# Altium PCB UC-526.PcbDoc (part 3 of 3)
Units mil, origin at the board's own origin, x right, y up, seen from the top; angles counter-clockwise.
Board outline 3149.61 x 3149.61 mil, 2 copper layers (Top Layer, Bottom Layer); 464 components, 208 nets, 2160 pads, 392 vias.
Unrouted connection lines stored in the file: 5.
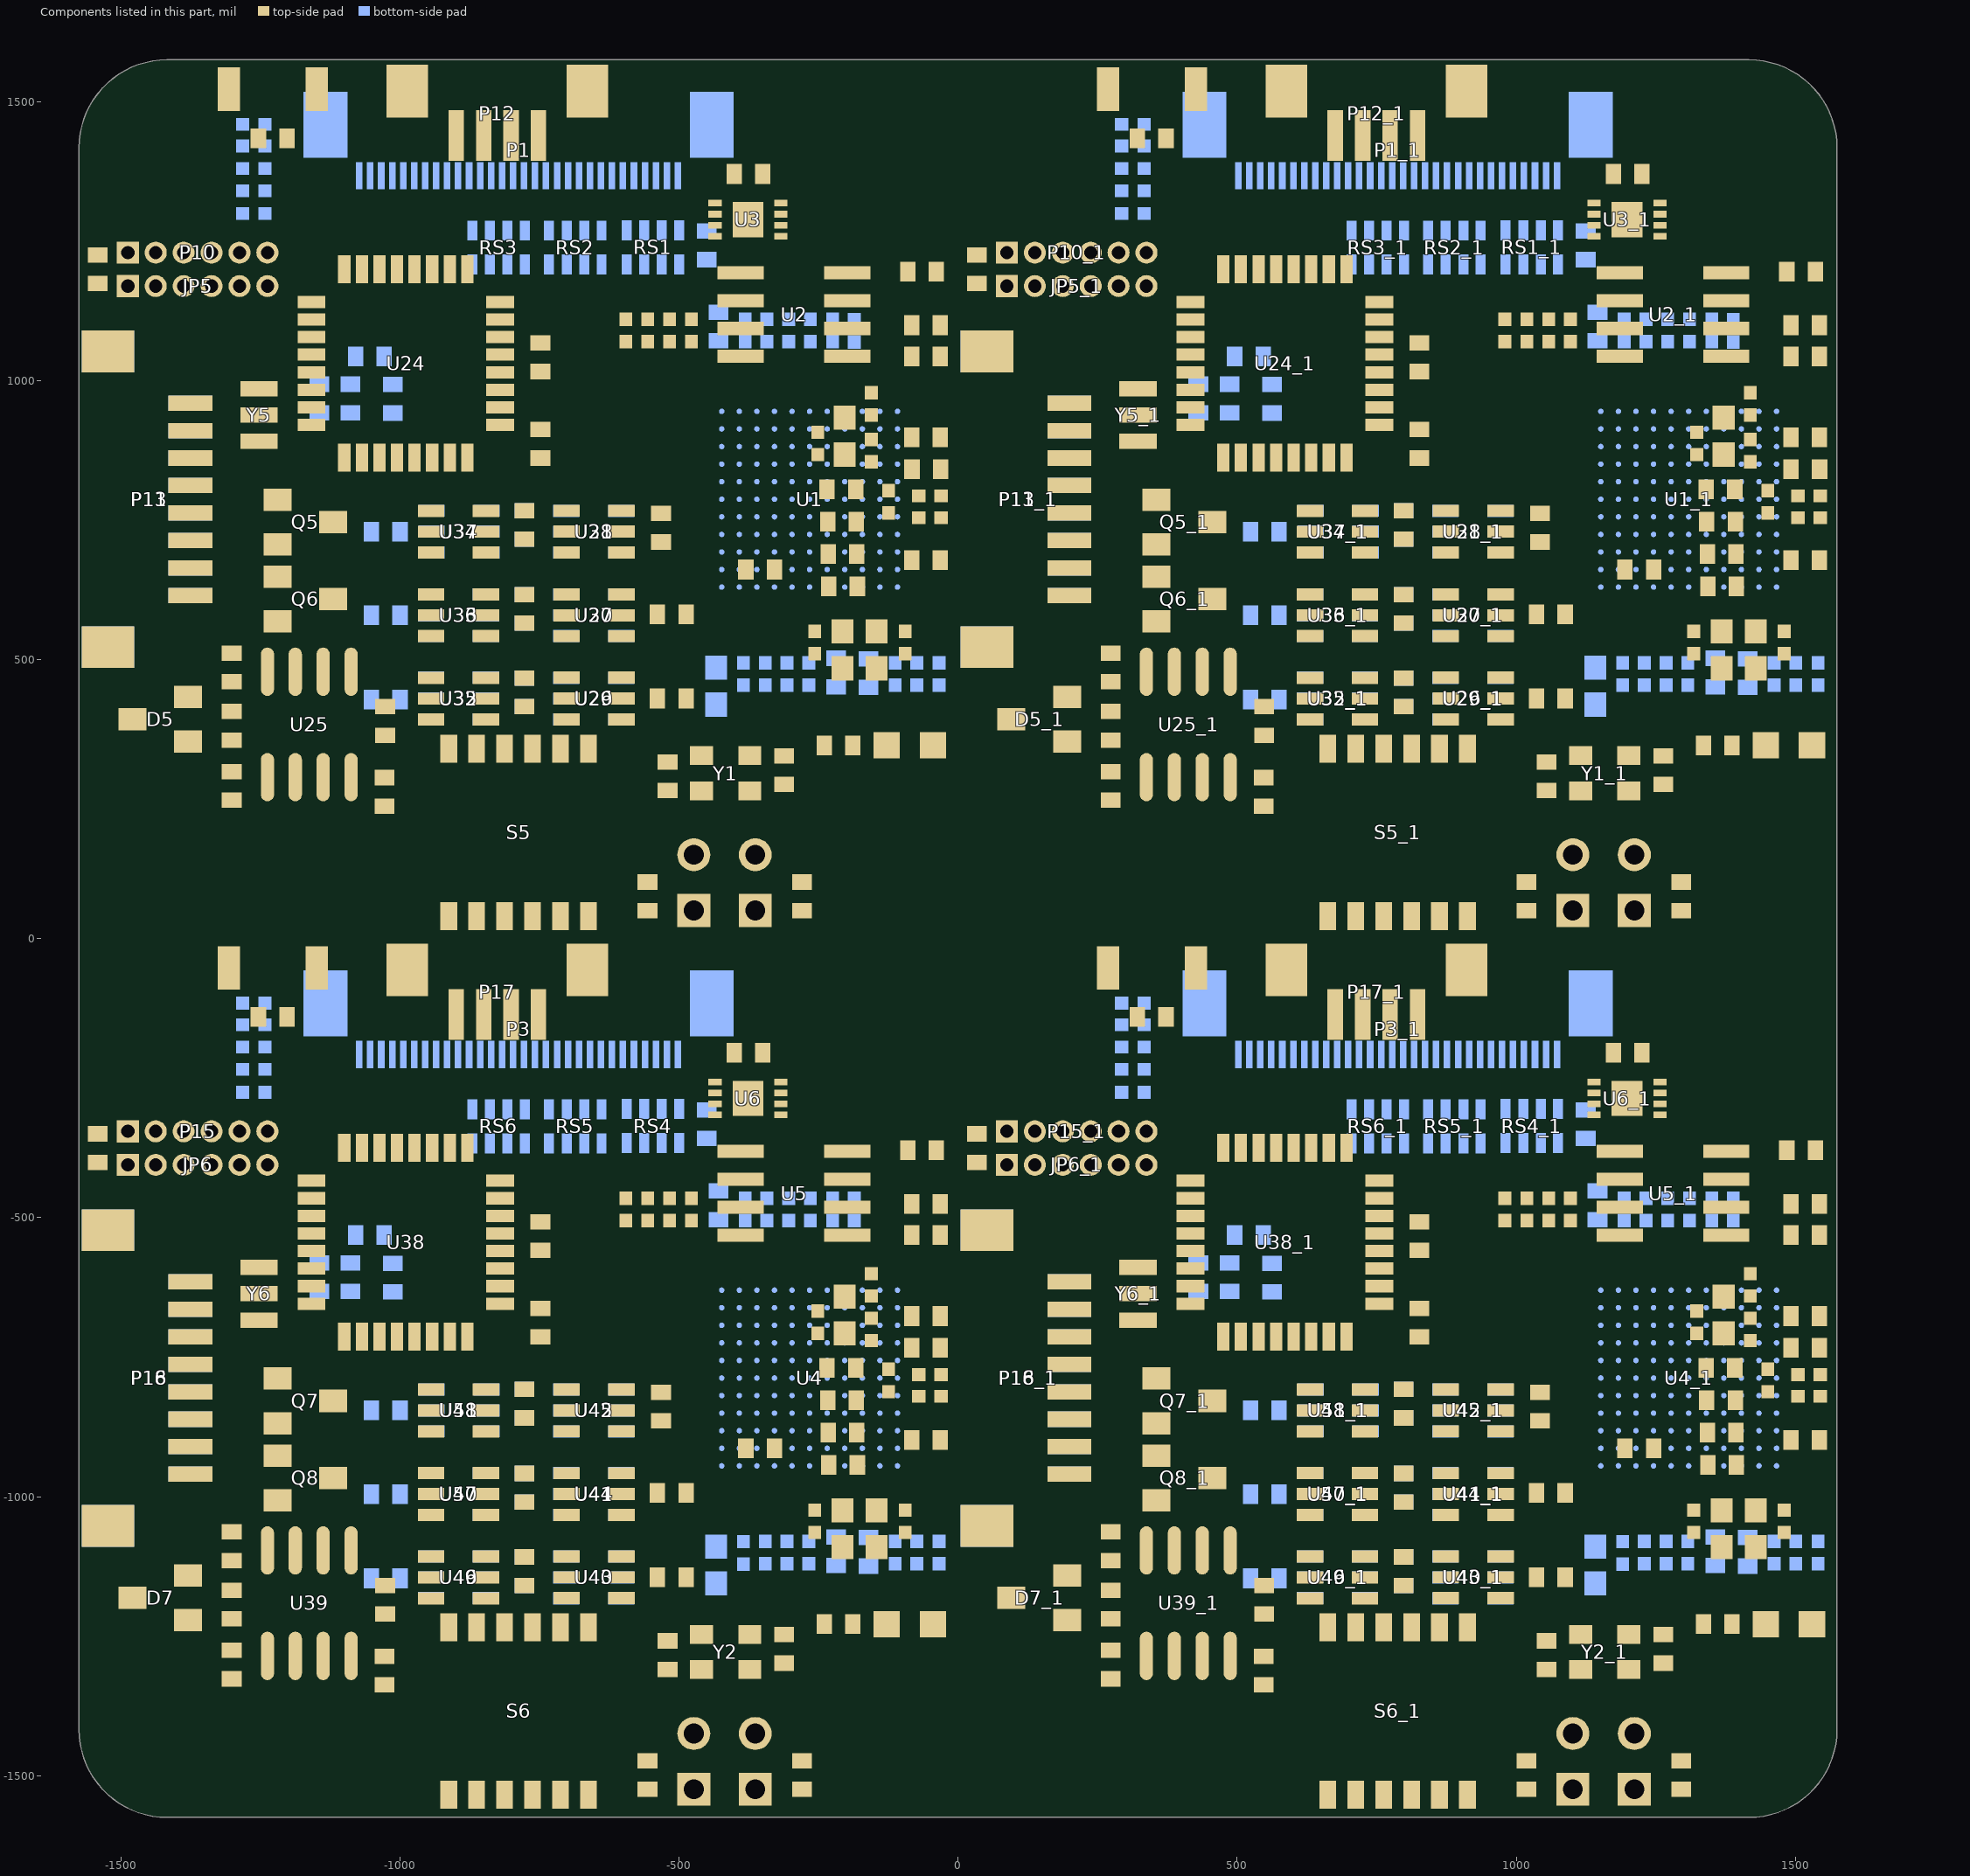
[diagram p3: the components of this part, seen from the top]

## Via types
v1: diameter 24, hole 12, Top Layer to Bottom Layer, tented both sides, 320 vias
v2: diameter 40, hole 20, Top Layer to Bottom Layer, tented both sides, 60 vias
v3: diameter 30, hole 15, Top Layer to Bottom Layer, tented both sides, 4 vias
v4: diameter 50, hole 25, Top Layer to Bottom Layer, tented both sides, 4 vias
v5: diameter 24, hole 12, Top Layer to Bottom Layer, 4 vias

## Nets (pads, with @x,y where several pads share a name; then routed paths per layer and width w, separated by ;. In a path a pad name is that pad's centre, name@x,y a point inside that pad or via, vN(x,y) a via of type N, cw(c..) or ccw(c..) an arc to the next point about the centre after c; other vN are vias at no path point) (continued)
pads on no net: C1_1.1 C1_1.2 C2_1.1 C2_1.2 C4_1.1 C4_1.2 C5_1.1 C5_1.2 C6_1.1 C6_1.2 C7_1.1 C7_1.2 C8_1.1 C8_1.2 C9_1.1 C9_1.2 C10_1.1 C10_1.2 C11_1.1 C11_1.2 C12_1.1 C12_1.2 C13_1.1 C13_1.2 C14_1.1 C14_1.2 C15_1.1 C15_1.2 C16_1.1 C16_1.2 C17_1.1 C17_1.2 C18_1.1 C18_1.2 C19_1.1 C19_1.2 C20_1.1 C20_1.2 C21_1.1 C21_1.2 C22_1.1 C22_1.2 C23_1.1 C23_1.2 C24_1.1 C24_1.2 C25_1.1 C25_1.2 C26_1.1 C26_1.2 C27_1.1 C27_1.2 C28_1.1 C28_1.2 C29_1.1 C29_1.2 C30_1.1 C30_1.2 C31_1.1 C31_1.2 C32_1.1 C32_1.2 C33_1.1 C33_1.2 C34_1.1 C34_1.2 C35_1.1 C35_1.2 C36_1.1 C36_1.2 C37_1.1 C37_1.2 C38_1.1 C38_1.2 C39_1.1 C39_1.2 C40_1.1 C40_1.2 C41_1.1 C41_1.2 C42_1.1 C42_1.2 C44_1.1 C44_1.2 C45_1.1 C45_1.2 C46_1.1 C46_1.2 C47_1.1 C47_1.2 C48_1.1 C48_1.2 C49_1.1 C49_1.2 C50_1.1 C50_1.2 C51_1.1 C51_1.2 C52_1.1 C52_1.2 C53_1.1 C53_1.2 C54_1.1 C54_1.2 C55_1.1 C55_1.2 C56_1.1 C56_1.2 C57_1.1 C57_1.2 C58_1.1 C58_1.2 C59_1.1 C59_1.2 C60_1.1 C60_1.2 C61_1.1 C61_1.2 C62_1.1 C62_1.2 C63_1.1 C63_1.2 C64_1.1 C64_1.2 C65_1.1 C65_1.2 C66_1.1 C66_1.2 C67_1.1 C67_1.2 C68_1.1 C68_1.2 C69_1.1 C69_1.2 C70_1.1 C70_1.2 C71_1.1 C71_1.2 C72_1.1 C72_1.2 C73_1.1 C73_1.2 C74_1.1 C74_1.2 C75_1.1 C75_1.2 C76_1.1 C76_1.2 C77_1.1 C77_1.2 C78_1.1 C78_1.2 C79_1.1 C79_1.2 C80_1.1 C80_1.2 C256_1.1 C256_1.2 C257_1.1 C257_1.2 C258_1.1 C258_1.2 C259_1.1 C259_1.2 C260_1.1 C260_1.2 C261_1.1 C261_1.2 C262_1.1 C262_1.2 C263_1.1 C263_1.2 D5_1.1 D5_1.2 D5_1.3 D7_1.1 D7_1.2 D7_1.3 JP5_1.1 JP5_1.2 JP5_1.3 JP5_1.4 JP5_1.5 JP5_1.6 JP6_1.1 JP6_1.2 JP6_1.3 JP6_1.4 JP6_1.5 JP6_1.6 K5_1.1 K5_1.2 K6_1.1 K6_1.2 L1_1.1 L1_1.2 L2_1.1 L2_1.2 L3_1.1 L3_1.2 L4_1.1 L4_1.2 L5_1.1 L5_1.2 L6_1.1 L6_1.2 L7_1.1 L7_1.2 L8_1.1 L8_1.2 P1.31 P1_1.1 P1_1.2 P1_1.3 P1_1.4 P1_1.5 P1_1.6 P1_1.7 P1_1.8 P1_1.9 P1_1.10 P1_1.11 P1_1.12 P1_1.13 P1_1.14 P1_1.15 P1_1.16 P1_1.17 P1_1.18 P1_1.19 P1_1.20 P1_1.21 P1_1.22 P1_1.23 P1_1.24 P1_1.25 P1_1.26 P1_1.27 P1_1.28 P1_1.29 P1_1.30 P1_1.31 P2_1.1 P2_1.2 P3.31 P3_1.1 P3_1.2 P3_1.3 P3_1.4 P3_1.5 P3_1.6 P3_1.7 P3_1.8 P3_1.9 P3_1.10 P3_1.11 P3_1.12 P3_1.13 P3_1.14 P3_1.15 P3_1.16 P3_1.17 P3_1.18 P3_1.19 P3_1.20 P3_1.21 P3_1.22 P3_1.23 P3_1.24 P3_1.25 P3_1.26 P3_1.27 P3_1.28 P3_1.29 P3_1.30 P3_1.31 P4_1.1 P4_1.2 P9_1.1 P9_1.2 P10_1.1 P10_1.2 P10_1.3 P10_1.4 P10_1.5 P10_1.6 P11.9 P11_1.1 P11_1.2 P11_1.3 P11_1.4 P11_1.5 P11_1.6 P11_1.7 P11_1.8 P11_1.9 P12.7 P12_1.1 P12_1.2 P12_1.3 P12_1.4 P12_1.7 P13.9 P13_1.1 P13_1.2 P13_1.3 P13_1.4 P13_1.5 P13_1.6 P13_1.7 P13_1.8 P13_1.9 P14_1.1 P14_1.2 P15_1.1 P15_1.2 P15_1.3 P15_1.4 P15_1.5 P15_1.6 P16.9 P16_1.1 P16_1.2 P16_1.3 P16_1.4 P16_1.5 P16_1.6 P16_1.7 P16_1.8 P16_1.9 P17.7 P17_1.1 P17_1.2 P17_1.3 P17_1.4 P17_1.7 P18.9 P18_1.1 P18_1.2 P18_1.3 P18_1.4 P18_1.5 P18_1.6 P18_1.7 P18_1.8 P18_1.9 Q5_1.D Q5_1.G Q5_1.S Q6_1.D Q6_1.G Q6_1.S Q7_1.D Q7_1.G Q7_1.S Q8_1.D Q8_1.G Q8_1.S R1_1.1 R1_1.2 R2_1.1 R2_1.2 R3_1.1 R3_1.2 R4_1.1 R4_1.2 R5_1.1 R5_1.2 R6_1.1 R6_1.2 R7_1.1 R7_1.2 R8_1.1 R8_1.2 R9_1.1 R9_1.2 R10_1.1 R10_1.2 R11_1.1 R11_1.2 R12_1.1 R12_1.2 R13_1.1 R13_1.2 R14_1.1 R14_1.2 R15_1.1 R15_1.2 R16_1.1 R16_1.2 R17_1.1 R17_1.2 R18_1.1 R18_1.2 R19_1.1 R19_1.2 R20_1.1 R20_1.2 R21_1.1 R21_1.2 R22_1.1 R22_1.2 R130_1.1 R130_1.2 R131_1.1 R131_1.2 R132_1.1 R132_1.2 R133_1.1 R133_1.2 R134_1.1 R134_1.2 R135_1.1 R135_1.2 R136_1.1 R136_1.2 R137_1.1 R137_1.2 R138_1.1 R138_1.2 R140_1.1 R140_1.2 R141_1.1 R141_1.2 R142_1.1 R142_1.2 R143_1.1 R143_1.2 R144_1.1 R144_1.2 R145_1.1 R145_1.2 R146_1.1 R146_1.2 R147_1.1 R147_1.2 R148_1.1 R148_1.2 R149_1.1 R149_1.2 R150_1.1 R150_1.2 R151_1.1 R151_1.2 R152_1.1 R152_1.2 R153_1.1 R153_1.2 R154_1.1 R154_1.2 R155_1.1 R155_1.2 R156_1.1 R156_1.2 R157_1.1 R157_1.2 R158_1.1 R158_1.2 R159_1.1 R159_1.2 R160_1.1 R160_1.2 R161_1.1 R161_1.2 R163_1.1 R163_1.2 R164_1.1 R164_1.2 R165_1.1 R165_1.2 R166_1.1 R166_1.2 R167_1.1 R167_1.2 R168_1.1 R168_1.2 R169_1.1 R169_1.2 R170_1.1 R170_1.2 R171_1.1 R171_1.2 R172_1.1 R172_1.2 R173_1.1 R173_1.2 R174_1.1 R174_1.2 R175_1.1 R175_1.2 RS1_1.1 RS1_1.2 RS1_1.3 RS1_1.4 RS1_1.5 RS1_1.6 RS1_1.7 RS1_1.8 RS2_1.1 RS2_1.2 RS2_1.3 RS2_1.4 RS2_1.5 RS2_1.6 RS2_1.7 RS2_1.8 RS3.3 RS3.6 RS3_1.1 RS3_1.2 RS3_1.3 RS3_1.4 RS3_1.5 RS3_1.6 RS3_1.7 RS3_1.8 RS4_1.1 RS4_1.2 RS4_1.3 RS4_1.4 RS4_1.5 RS4_1.6 RS4_1.7 RS4_1.8 RS5_1.1 RS5_1.2 RS5_1.3 RS5_1.4 RS5_1.5 RS5_1.6 RS5_1.7 RS5_1.8 RS6.3 RS6.6 RS6_1.1 RS6_1.2 RS6_1.3 RS6_1.4 RS6_1.5 RS6_1.6 RS6_1.7 RS6_1.8 S5_1.1 S5_1.2 S5_1.3 S5_1.4 S5_1.5 S5_1.6 S5_1.7 S5_1.8 S5_1.9 S5_1.10 S5_1.11 S5_1.12 S6_1.1 S6_1.2 S6_1.3 S6_1.4 S6_1.5 S6_1.6 S6_1.7 S6_1.8 S6_1.9 S6_1.10 S6_1.11 S6_1.12 U1.A11 U1.B11 U1.C4 U1.C10 U1.D1 U1.D2 U1.D3 U1.D7 U1.D11 U1.E1 U1.E4 U1.E5 U1.E7 U1.E8 U1.F2 U1.F3 U1.F4 U1.F5 U1.F6 U1.G2 U1.G3 U1.H2 U1.H3 U1.H6 U1.J1 U1.J2 U1.J3 U1.J4 U1.K1 U1.K2 U1.K5 U1.L4 U1_1.A1 U1_1.A2 U1_1.A3 U1_1.A4 U1_1.A5 U1_1.A6 U1_1.A7 U1_1.A8 U1_1.A9 U1_1.A10 U1_1.A11 U1_1.B1 U1_1.B2 U1_1.B3 U1_1.B4 U1_1.B5 U1_1.B6 U1_1.B7 U1_1.B8 U1_1.B9 U1_1.B10 U1_1.B11 U1_1.C1 U1_1.C2 U1_1.C3 U1_1.C4 U1_1.C5 U1_1.C6 U1_1.C7 U1_1.C8 U1_1.C9 U1_1.C10 U1_1.C11 U1_1.D1 U1_1.D2 U1_1.D3 U1_1.D4 U1_1.D5 U1_1.D6 U1_1.D7 U1_1.D8 U1_1.D9 U1_1.D10 U1_1.D11 U1_1.E1 U1_1.E2 U1_1.E3 U1_1.E4 U1_1.E5 U1_1.E6 U1_1.E7 U1_1.E8 U1_1.E9 U1_1.E10 U1_1.E11 U1_1.F1 U1_1.F2 U1_1.F3 U1_1.F4 U1_1.F5 U1_1.F6 U1_1.F7 U1_1.F8 U1_1.F9 U1_1.F10 U1_1.F11 U1_1.G1 U1_1.G2 U1_1.G3 U1_1.G4 U1_1.G5 U1_1.G6 U1_1.G7 U1_1.G8 U1_1.G9 U1_1.G10 U1_1.G11 U1_1.H1 U1_1.H2 U1_1.H3 U1_1.H4 U1_1.H5 U1_1.H6 U1_1.H7 U1_1.H8 U1_1.H9 U1_1.H10 U1_1.H11 U1_1.J1 U1_1.J2 U1_1.J3 U1_1.J4 U1_1.J5 U1_1.J6 U1_1.J7 U1_1.J8 U1_1.J9 U1_1.J10 U1_1.J11 U1_1.K1 U1_1.K2 U1_1.K3 U1_1.K4 U1_1.K5 U1_1.K6 U1_1.K7 U1_1.K8 U1_1.K9 U1_1.K10 U1_1.K11 U1_1.L1 U1_1.L2 U1_1.L3 U1_1.L4 U1_1.L5 U1_1.L6 U1_1.L7 U1_1.L8 U1_1.L9 U1_1.L10 U1_1.L11 U2.1 U2.2 U2.3 U2.7 U2_1.1 U2_1.2 U2_1.3 U2_1.4 U2_1.5 U2_1.6 U2_1.7 U2_1.8 U3.1 U3.2 U3.3 U3.7 U3_1.1 U3_1.2 U3_1.3 U3_1.4 U3_1.5 U3_1.6 U3_1.7 U3_1.8 U4.A11 U4.B11 U4.C4 U4.C10 U4.D1 U4.D2 U4.D3 U4.D7 U4.D11 U4.E1 U4.E4 U4.E5 U4.E7 U4.E8 U4.F2 U4.F3 U4.F4 U4.F5 U4.F6 U4.G2 U4.G3 U4.H2 U4.H3 U4.H6 U4.J1 U4.J2 U4.J3 U4.J4 U4.K1 U4.K2 U4.K5 U4.L4 U4_1.A1 U4_1.A2 U4_1.A3 U4_1.A4 U4_1.A5 U4_1.A6 U4_1.A7 U4_1.A8 U4_1.A9 U4_1.A10 U4_1.A11 U4_1.B1 U4_1.B2 U4_1.B3 U4_1.B4 U4_1.B5 U4_1.B6 U4_1.B7 U4_1.B8 U4_1.B9 U4_1.B10 U4_1.B11 U4_1.C1 U4_1.C2 U4_1.C3 U4_1.C4 U4_1.C5 U4_1.C6 U4_1.C7 U4_1.C8 U4_1.C9 U4_1.C10 U4_1.C11 U4_1.D1 U4_1.D2 U4_1.D3 U4_1.D4 U4_1.D5 U4_1.D6 U4_1.D7 U4_1.D8 U4_1.D9 U4_1.D10 U4_1.D11 U4_1.E1 U4_1.E2 U4_1.E3 U4_1.E4 U4_1.E5 U4_1.E6 U4_1.E7 U4_1.E8 U4_1.E9 U4_1.E10 U4_1.E11 U4_1.F1 U4_1.F2 U4_1.F3 U4_1.F4 U4_1.F5 U4_1.F6 U4_1.F7 U4_1.F8 U4_1.F9 U4_1.F10 U4_1.F11 U4_1.G1 U4_1.G2 U4_1.G3 U4_1.G4 U4_1.G5 U4_1.G6 U4_1.G7 U4_1.G8 U4_1.G9 U4_1.G10 U4_1.G11 U4_1.H1 U4_1.H2 U4_1.H3 U4_1.H4 U4_1.H5 U4_1.H6 U4_1.H7 U4_1.H8 U4_1.H9 U4_1.H10 U4_1.H11 U4_1.J1 U4_1.J2 U4_1.J3 U4_1.J4 U4_1.J5 U4_1.J6 U4_1.J7 U4_1.J8 U4_1.J9 U4_1.J10 U4_1.J11 U4_1.K1 U4_1.K2 U4_1.K3 U4_1.K4 U4_1.K5 U4_1.K6 U4_1.K7 U4_1.K8 U4_1.K9 U4_1.K10 U4_1.K11 U4_1.L1 U4_1.L2 U4_1.L3 U4_1.L4 U4_1.L5 U4_1.L6 U4_1.L7 U4_1.L8 U4_1.L9 U4_1.L10 U4_1.L11 U5.1 U5.2 U5.3 U5.7 U5_1.1 U5_1.2 U5_1.3 U5_1.4 U5_1.5 U5_1.6 U5_1.7 U5_1.8 U6.1 U6.2 U6.3 U6.7 U6_1.1 U6_1.2 U6_1.3 U6_1.4 U6_1.5 U6_1.6 U6_1.7 U6_1.8 U24_1.1 U24_1.2 U24_1.3 U24_1.4 U24_1.5 U24_1.6 U24_1.7 U24_1.8 U24_1.9 U24_1.10 U24_1.11 U24_1.12 U24_1.13 U24_1.14 U24_1.15 U24_1.16 U24_1.17 U24_1.18 U24_1.19 U24_1.20 U24_1.21 U24_1.22 U24_1.23 U24_1.24 U24_1.25 U24_1.26 U24_1.27 U24_1.28 U24_1.29 U24_1.30 U24_1.31 U24_1.32 U25_1.1 U25_1.2 U25_1.3 U25_1.4 U25_1.5 U25_1.6 U25_1.7 U25_1.8 U26_1.1 U26_1.2 U26_1.3 U26_1.4 U26_1.5 U26_1.6 U27_1.1 U27_1.2 U27_1.3 U27_1.4 U27_1.5 U27_1.6 U28_1.1 U28_1.2 U28_1.3 U28_1.4 U28_1.5 U28_1.6 U29_1.1 U29_1.2 U29_1.3 U29_1.4 U29_1.5 U29_1.6 U30_1.1 U30_1.2 U30_1.3 U30_1.4 U30_1.5 U30_1.6 U31_1.1 U31_1.2 U31_1.3 U31_1.4 U31_1.5 U31_1.6 U32_1.1 U32_1.2 U32_1.3 U32_1.4 U32_1.5 U32_1.6 U33_1.1 U33_1.2 U33_1.3 U33_1.4 U33_1.5 U33_1.6 U34_1.1 U34_1.2 U34_1.3 U34_1.4 U34_1.5 U34_1.6 U35_1.1 U35_1.2 U35_1.3 U35_1.4 U35_1.5 U35_1.6 U36_1.1 U36_1.2 U36_1.3 U36_1.4 U36_1.5 U36_1.6 U37_1.1 U37_1.2 U37_1.3 U37_1.4 U37_1.5 U37_1.6 U38_1.1 U38_1.2 U38_1.3 U38_1.4 U38_1.5 U38_1.6 U38_1.7 U38_1.8 U38_1.9 U38_1.10 U38_1.11 U38_1.12 U38_1.13 U38_1.14 U38_1.15 U38_1.16 U38_1.17 U38_1.18 U38_1.19 U38_1.20 U38_1.21 U38_1.22 U38_1.23 U38_1.24 U38_1.25 U38_1.26 U38_1.27 U38_1.28 U38_1.29 U38_1.30 U38_1.31 U38_1.32 U39_1.1 U39_1.2 U39_1.3 U39_1.4 U39_1.5 U39_1.6 U39_1.7 U39_1.8 U40_1.1 U40_1.2 U40_1.3 U40_1.4 U40_1.5 U40_1.6 U41_1.1 U41_1.2 U41_1.3 U41_1.4 U41_1.5 U41_1.6 U42_1.1 U42_1.2 U42_1.3 U42_1.4 U42_1.5 U42_1.6 U43_1.1 U43_1.2 U43_1.3 U43_1.4 U43_1.5 U43_1.6 U44_1.1 U44_1.2 U44_1.3 U44_1.4 U44_1.5 U44_1.6 U45_1.1 U45_1.2 U45_1.3 U45_1.4 U45_1.5 U45_1.6 U46_1.1 U46_1.2 U46_1.3 U46_1.4 U46_1.5 U46_1.6 U47_1.1 U47_1.2 U47_1.3 U47_1.4 U47_1.5 U47_1.6 U48_1.1 U48_1.2 U48_1.3 U48_1.4 U48_1.5 U48_1.6 U49_1.1 U49_1.2 U49_1.3 U49_1.4 U49_1.5 U49_1.6 U50_1.1 U50_1.2 U50_1.3 U50_1.4 U50_1.5 U50_1.6 U51_1.1 U51_1.2 U51_1.3 U51_1.4 U51_1.5 U51_1.6 V1_1.1 V1_1.2 V2_1.1 V2_1.2 Y1.3 Y1.4 Y1_1.1 Y1_1.2 Y1_1.3 Y1_1.4 Y2.3 Y2.4 Y2_1.1 Y2_1.2 Y2_1.3 Y2_1.4 Y5_1.1 Y5_1.2 Y5_1.3 Y6_1.1 Y6_1.2 Y6_1.3
copper on no net: | length 98100.6
  Top Layer w6: v1@888.6,-429.9 888.6,-684.4 923.6,-719.4 1209.6,-719.4 v1(1261.6,-771.4) ; v1@888.6,1144.9 888.6,890.4 923.6,855.4 1209.6,855.4 v1(1261.6,803.4) ; v1(934.6,-469.4) 934.6,-654.4 964.6,-684.4 1255.08,-684.4 v1(1261.81,-677.67) ; v1(934.6,1105.4) 934.6,920.4 964.6,890.4 1255.08,890.4 v1(1261.81,897.13) ; v1(959.6,-640.4) 992.6,-673.4 1237.8,-673.4 1253.53,-657.67 1273.79,-657.67 v1(1294.6,-678.48) v1@1294.6,-675.28 ; v1(959.6,934.4) 992.6,901.4 1237.8,901.4 1253.53,917.13 1273.79,917.13 v1(1294.6,896.32) v1@1294.6,899.53 ; v1(961.47,-432.27) 940.73,-432.27 913.6,-459.4 913.6,-657.4 953.6,-697.4 1252.6,-697.4 v1(1262.6,-707.4) ; v1(961.47,-402.27) 946.73,-402.27 902.6,-446.4 902.6,-662.4 948.6,-708.4 1132.6,-708.4 ; v1(961.47,1142.53) 940.73,1142.53 913.6,1115.4 913.6,917.4 953.6,877.4 1252.6,877.4 v1(1262.6,867.4) ; v1(961.47,1172.53) 946.73,1172.53 902.6,1128.4 902.6,912.4 948.6,866.4 1132.6,866.4 ; v1(963.6,-775.4) 967.6,-779.4 1089.6,-779.4 1102.6,-792.4 1208.55,-792.4 v1(1229.81,-771.14) ; v1(963.6,799.4) 967.6,795.4 1089.6,795.4 1102.6,782.4 1208.55,782.4 v1(1229.81,803.66) ; v1(988.6,-739.4) v1(1198.07,-739.4) ; v1(988.6,835.4) v1(1198.07,835.4) ; v1(993.6,-631.4) 999.6,-625.4 1268.23,-625.4 1289.82,-646.99 v1(1294.6,-646.99) v1@1294.28,-646.67 ; v1(993.6,943.4) 999.6,949.4 1268.23,949.4 1289.82,927.81 v1(1294.6,927.81) v1@1294.28,928.13 ; v1(1017.6,-650.4) 1027.6,-660.4 1216.6,-660.4 v1(1230.6,-646.4) ; v1(1017.6,924.4) 1027.6,914.4 1216.6,914.4 v1(1230.6,928.4) ; v1(1027.6,-759.4) 1030.6,-756.4 1183.58,-756.4 v1(1198.6,-771.42) ; v1(1027.6,815.4) 1030.6,818.4 1183.58,818.4 v1(1198.6,803.38) ; v1(1075.6,-838.4) 1225.6,-838.4 v1(1229.6,-834.4) ; v1(1075.6,736.4) 1225.6,736.4 v1(1229.6,740.4) ; v1(1089.6,-811.4) 1096.6,-804.4 v1(1231.58,-804.4) 1222.58,-813.4 ; v1(1089.6,763.4) 1096.6,770.4 v1(1231.58,770.4) 1222.58,761.4 ; 1115.29,-1309.9 1160.6,-1264.59 1160.6,-1234.4 1178.6,-1216.4 1239.6,-1216.4 1252.1,-1203.9 1252.1,-980.9 1272.6,-960.4 1272.6,-824.4 v1(1293.57,-803.37) v1(1293.57,-803.37) ; 1115.29,264.91 1160.6,310.21 1160.6,340.4 1178.6,358.4 1239.6,358.4 1252.1,370.9 1252.1,593.9 1272.6,614.4 1272.6,750.4 v1(1293.57,771.43) v1(1293.57,771.43) ; 1124.6,-708.4 1132.6,-708.4 ; 1124.6,866.4 1132.6,866.4 ; v1(1261.6,-740.4) 1229.6,-708.4 1132.6,-708.4 ; v1(1261.6,834.4) 1229.6,866.4 1132.6,866.4 ; 1263.6,-1247.22 1263.6,-984.96 1293.6,-954.96 v1(1293.58,-834.42) ; 1263.6,327.58 1263.6,589.85 1293.6,619.85 v1(1293.58,740.38)
  Top Layer w10: 38.01,-405.4 87.6,-405.4 ; 38.01,-345.4 87.6,-345.4 ; 38.01,1169.4 87.6,1169.4 ; 38.01,1229.4 87.6,1229.4 ; v1(66.6,-713.58) 199.57,-713.58 ; v1(66.6,861.22) 199.57,861.22 ; 93.6,-357.4 98.6,-352.4 ; 93.6,1217.4 98.6,1222.4 ; v1@94.6,-744.4 94.6,-822.4 133.42,-861.22 199.57,-861.22 250.78,-861.22 274.6,-837.4 274.6,-543.61 384.39,-433.82 416.6,-433.82 ; v1@94.6,830.4 94.6,752.4 133.42,713.58 199.57,713.58 250.78,713.58 274.6,737.4 274.6,1031.19 384.39,1140.98 416.6,1140.98 ; v1@118.6,-762.4 118.6,-802.4 128.2,-812.01 199.57,-812.01 ; v1@118.6,812.4 118.6,772.4 128.2,762.8 199.57,762.8 ; v1(139.6,-910.4) 76.6,-910.4 44.6,-878.4 44.6,-684.4 64.63,-664.37 199.57,-664.37 ; v1(139.6,664.4) 76.6,664.4 44.6,696.4 44.6,890.4 64.63,910.43 199.57,910.43 ; v1(140.6,-785.4) 163.2,-762.8 199.57,-762.8 ; v1(140.6,789.4) 163.2,812.01 199.57,812.01 ; 187.6,-345.4 195.62,-345.4 225.3,-315.72 488.91,-315.72 506.86,-333.67 506.86,-375.05 506.86,-468.67 v1@580.1,-541.9 ; 187.6,1229.4 195.62,1229.4 225.3,1259.09 488.91,1259.09 506.86,1241.14 506.86,1199.75 506.86,1106.14 v1@580.1,1032.9 ; 195.6,-1221.4 271.19,-1221.4 ; 195.6,-1141.4 273.6,-1141.4 ; 195.6,353.4 271.19,353.4 ; 195.6,433.4 273.6,433.4 ; 200.97,-813.4 199.57,-812.01 ; 200.97,761.4 199.57,762.8 ; 273.6,-1275.4 273.6,-1218.99 369.19,-1218.99 387.6,-1237.4 387.6,-1285.4 ; 273.6,-1114.4 273.6,-1167.81 427.01,-1167.81 437.6,-1178.4 437.6,-1285.4 ; 273.6,299.4 273.6,355.81 369.19,355.81 387.6,337.4 387.6,289.4 ; 273.6,460.4 273.6,406.99 427.01,406.99 437.6,396.4 437.6,289.4 ; 330.6,-685.3 353.7,-685.3 384.71,-654.29 416.6,-654.29 ; 330.6,-590.81 356.01,-590.81 388,-622.8 416.6,-622.8 ; 330.6,889.5 353.7,889.5 384.71,920.51 416.6,920.51 ; 330.6,983.99 356.01,983.99 388,952 416.6,952 ; 337.6,-1096.43 337.6,-1063.4 361.6,-1039.4 427.6,-1039.4 v1(436.6,-1030.4) ; 337.6,478.38 337.6,511.4 361.6,535.4 427.6,535.4 v1(436.6,544.4) ; 355.6,-926.4 389.6,-926.4 409.6,-906.4 409.6,-791.4 430.6,-770.4 539.6,-770.4 ; 355.6,-788.4 388.6,-755.4 583.6,-755.4 601.35,-737.65 601.35,-713.05 ; 355.6,648.4 389.6,648.4 409.6,668.4 409.6,783.4 430.6,804.4 539.6,804.4 ; 355.6,786.4 388.6,819.4 583.6,819.4 601.35,837.15 601.35,861.75 ; 387.6,-1096.43 v1(412.6,-1096.43) 437.6,-1096.43 437.6,-1134.4 462.42,-1159.22 548.6,-1159.22 ; 387.6,478.38 v1(412.6,478.38) 437.6,478.38 437.6,440.4 462.42,415.58 548.6,415.58 ; 416.6,-465.32 471.51,-465.32 v1(499.6,-493.4) ; 416.6,1109.49 471.51,1109.49 v1(499.6,1081.4) ; 426.1,-52.4 390.48,-52.4 372.6,-70.29 372.6,-140.4 372.6,-266.4 395.6,-289.4 540.47,-289.4 552.6,-289.4 569.85,-306.66 569.85,-375.05 569.85,-415.15 v1(569.6,-415.4) ; 426.1,1522.4 390.48,1522.4 372.6,1504.52 372.6,1434.4 372.6,1308.4 395.6,1285.4 540.47,1285.4 552.6,1285.4 569.85,1268.15 569.85,1199.75 569.85,1159.66 v1(569.6,1159.4) ; v1(430.6,-689.4) 454.25,-713.06 475.36,-713.06 ; v1(430.6,885.4) 454.25,861.75 475.36,861.75 ; 455.6,-966.4 513.6,-966.4 526.35,-953.65 v1(526.35,-895.65) ; 455.6,-828.4 457.6,-828.4 475.6,-846.4 v1(475.6,-882.4) ; 455.6,608.4 513.6,608.4 526.35,621.15 v1(526.35,679.15) ; 455.6,746.4 457.6,746.4 475.6,728.4 v1(475.6,692.4) ; v1(461.6,-1004.4) 487.6,-1030.4 487.6,-1096.43 ; v1(461.6,570.4) 487.6,544.4 487.6,478.38 ; 475.37,-375.05 446.02,-404.4 392.6,-404.4 259.6,-537.4 259.6,-778.4 225.99,-812.01 199.57,-812.01 ; 475.37,1199.75 446.02,1170.4 392.6,1170.4 259.6,1037.4 259.6,796.4 225.99,762.8 199.57,762.8 ; v1(493.6,-668.4) 506.86,-681.66 506.86,-713.06 ; v1(493.6,906.4) 506.86,893.14 506.86,861.75 ; 527.6,-770.4 539.6,-770.4 ; 527.6,804.4 539.6,804.4 ; 538.36,-713.05 538.36,-675.64 v1(547.6,-666.4) ; v1(538.36,-318.4) 538.36,-375.05 538.36,-456.16 v1(581.08,-498.88) v1@584.6,-502.4 ; 538.36,861.75 538.36,899.16 v1(547.6,908.4) ; v1(538.36,1256.4) 538.36,1199.75 538.36,1118.64 v1(581.08,1075.92) v1@584.6,1072.4 ; 569.85,-713.05 569.85,-680.15 v1(584.6,-665.4) ; 569.85,861.75 569.85,894.66 v1(584.6,909.4) ; v1(588.1,-895.9) 601.01,-882.99 630.67,-882.99 ; v1(588.1,678.9) 601.01,691.81 630.67,691.81 ; v1@593.6,-1045.4 606.4,-1032.6 630.67,-1032.6 ; v1@593.6,529.4 606.4,542.21 630.67,542.21 ; 623.8,-1182.2 630.67,-1182.2 676.4,-1182.2 v1@676.6,-1182.4 ; 623.8,392.6 630.67,392.6 676.4,392.6 v1@676.6,392.4 ; 632.84,-713.05 632.84,-745.16 607.6,-770.4 539.6,-770.4 ; 632.84,861.75 632.84,829.65 607.6,804.4 539.6,804.4 ; v1(644.6,-658.4) 644.6,-668.4 664.34,-688.14 664.34,-713.05 ; v1(644.6,916.4) 644.6,906.4 664.34,886.66 664.34,861.75 ; 662.6,-1534.4 v1(662.6,-1441.4) ; 662.6,40.4 v1(662.6,133.4) ; v1(666.6,-628.4) 667.6,-629.4 667.6,-666.4 679.25,-678.05 679.48,-678.05 695.83,-694.41 695.83,-713.06 ; v1(666.6,946.4) 667.6,945.4 667.6,908.4 679.25,896.75 679.48,896.75 695.83,880.39 695.83,861.75 ; v1(690.6,-654.29) 754.6,-654.29 ; v1(690.6,920.51) 754.6,920.51 ; 712.6,-1534.4 v1(712.6,-1441.4) ; 712.6,40.4 v1(712.6,133.4) ; 754.6,-559.8 826.6,-559.8 ; 754.6,1015 826.6,1015 ; 762.6,-1534.4 v1(762.6,-1441.4) ; 762.6,40.4 v1(762.6,133.4) ; 812.6,-1534.4 v1(812.6,-1441.4) ; 812.6,40.4 v1(812.6,133.4) ; 837,-1032.8 873.67,-1032.8 896.27,-1055.4 1003.25,-1055.4 v1(1013.23,-1045.42) ; 837,542 873.67,542 896.27,519.4 1003.25,519.4 v1(1013.23,529.38) ; 862.6,-1534.4 912.6,-1534.4 ; 862.6,40.4 912.6,40.4 ; 873.67,-882.8 899.27,-908.4 1004.6,-908.4 ; 873.67,692 899.27,666.4 1004.6,666.4 ; 876.6,-878.4 835.6,-919.4 835.6,-1172.4 845,-1181.8 873.67,-1181.8 v1@922.2,-1181.8 ; 876.6,696.4 835.6,655.4 835.6,402.4 845,393 873.67,393 v1@922.2,393 ; 1018.6,-1524.4 1101.6,-1524.4 1090.01,-1535.99 ; 1018.6,50.4 1101.6,50.4 1090.01,38.81 ; v1(1039.6,-129.4) 1273.6,-129.4 1289.6,-145.4 1289.6,-456.4 1314.6,-481.4 1376.49,-481.4 v1(1436.6,-481.4) 1486.01,-481.4 1492.01,-475.4 ; v1(1039.6,1445.4) 1273.6,1445.4 1289.6,1429.4 1289.6,1118.4 1314.6,1093.4 1376.49,1093.4 v1(1436.6,1093.4) 1486.01,1093.4 1492.01,1099.4 ; 1054.6,-1309.58 1114.98,-1309.58 1115.29,-1309.9 1115.6,-1310.2 ; 1054.6,265.22 1114.98,265.22 1115.29,264.91 1115.6,264.6 ; 1194.89,-913.36 1219.42,-888.83 1219.42,-877.58 v1(1231.6,-865.4) ; 1194.89,661.44 1219.42,685.97 1219.42,697.22 v1(1231.6,709.4) ; 1201.91,-1246.91 1202.22,-1247.22 1261.6,-1247.22 ; 1201.91,327.9 1202.22,327.58 1261.6,327.58 ; 1211.6,-1524.4 1211.78,-1524.58 1295.6,-1524.58 ; 1211.6,50.4 1211.78,50.22 1295.6,50.22 ; 1246.07,-913.36 1253.6,-905.83 1253.6,-811.4 1295.6,-769.4 1340.42,-769.4 ; 1246.07,661.44 1253.6,668.97 1253.6,763.4 1295.6,805.4 1340.42,805.4 ; 1257.65,-315.93 v1(1257.65,-361.4) 1257.65,-493.4 1295.65,-531.4 1376.49,-531.4 1443.6,-531.4 ; 1257.65,-296.24 1288.76,-296.24 ; 1257.65,1258.87 v1(1257.65,1213.4) 1257.65,1081.4 1295.65,1043.4 1376.49,1043.4 1443.6,1043.4 ; 1257.65,1278.56 1288.76,1278.56 ; 1261.28,-1246.91 1261.6,-1247.22 ; 1261.28,327.9 1261.6,327.58 ; 1263.6,-1249.22 1261.6,-1247.22 ; 1263.6,-1247.22 1261.6,-1247.22 ; 1263.6,325.58 1261.6,327.58 ; 1263.6,327.58 1261.6,327.58 ; 1318.1,-1024.22 1367.92,-1024.22 ; 1318.1,550.58 1367.92,550.58 ; 1322.6,-707.4 1360.42,-707.4 1366.01,-712.99 1366.01,-800.81 1392.6,-827.4 1394.52,-827.4 v1(1418.78,-803.15) ; 1322.6,867.4 1360.42,867.4 1366.01,861.81 1366.01,833.4 ; 1366.01,839.81 1366.01,833.4 ; 1368.1,-1024.4 1368.1,-910.9 1393.6,-885.4 1429.6,-885.4 1447.6,-867.4 1447.6,-866.4 v1(1450.6,-866.4) ; 1368.1,550.4 1368.1,663.9 1393.6,689.4 1429.6,689.4 1447.6,707.4 1447.6,708.4 v1(1450.6,708.4) ; 1391.6,-769.4 1394.19,-771.99 v1(1419.6,-771.99) ; 1391.6,805.4 1394.19,802.81 v1(1419.6,802.81) ; v1@1419.6,-773.99 v1@1421.6,-773.99 ; 1419.6,-720.4 v1(1419.6,-771.99) ; v1(1419.6,771.4) 1395.6,747.4 1392.6,747.4 1366.01,773.99 1366.01,833.4 ; v1@1419.6,800.81 v1@1421.6,800.81 ; 1419.6,854.4 v1(1419.6,802.81) ; 1450.42,-771.99 v1(1419.6,-771.99) ; 1450.42,802.81 v1(1419.6,802.81) ; v1(1450.54,-897.4) 1490.79,-897.4 ; v1(1450.54,677.4) 1490.79,677.4 1491.79,678.4 ; v1(1451.6,-928.26) 1436.46,-943.4 1394.6,-943.4 1394.6,-989.9 1429.1,-1024.4 1429.28,-1024.22 1480.1,-1024.22 ; v1(1451.6,646.54) 1436.46,631.4 1394.6,631.4 1394.6,584.9 1429.1,550.4 1429.28,550.58 1480.1,550.58 ; v1(1456.6,-531.4) 1492.01,-531.4 ; v1(1456.6,1043.4) 1492.01,1043.4
  Top Layer w20: 137.6,-405.4 137.6,-345.4 190.6,-292.4 287.18,-292.4 321.42,-258.16 321.42,-140.4 ; 137.6,1169.4 137.6,1229.4 190.6,1282.4 287.18,1282.4 321.42,1316.64 321.42,1434.4 ; 273.6,-1326.58 273.6,-1353.4 306.6,-1386.4 461.6,-1386.4 487.6,-1360.4 487.6,-1285.4 546.8,-1285.4 548.6,-1283.6 548.6,-1210.4 ; 273.6,248.22 273.6,221.4 306.6,188.4 461.6,188.4 487.6,214.4 487.6,289.4 546.8,289.4 548.6,291.2 548.6,364.4 ; v2(346.6,-528.4) 346.69,-528.31 416.6,-528.31 454.5,-528.31 517.49,-591.3 416.6,-591.3 ; v2(346.6,1046.4) 346.69,1046.5 416.6,1046.5 454.5,1046.5 517.49,983.51 416.6,983.51 ; v3@525.6,-591.4 680.6,-591.4 711.99,-622.79 754.6,-622.79 ; v3@525.6,983.4 680.6,983.4 711.99,952.01 754.6,952.01 ; 562.2,-957.8 630.67,-957.8 ; 562.2,617.01 630.67,617.01 ; v2(610.6,-316.21) 676.79,-316.21 724.99,-268.01 724.99,-135.76 ; v2(610.6,1258.59) 676.79,1258.59 724.99,1306.8 724.99,1439.05 ; 630.67,-1144.8 663.2,-1144.8 v2(680.6,-1127.4) v2(680.6,-976.4) ; 630.67,-1107.4 590.6,-1107.4 v2(556.6,-1073.4) 556.6,-834.4 582.81,-808.19 630.67,-808.19 661.7,-808.19 v2(679.6,-790.29) 702.49,-767.4 838.6,-767.4 870.6,-735.4 870.6,-461.4 774.2,-365.01 774.2,-135.76 ; 630.67,-995.2 661.8,-995.2 v2(680.6,-976.4) ; 630.67,-845.59 659.79,-845.59 v2(680.6,-866.4) v2(680.6,-976.4) ; 630.67,430 663.2,430 v2(680.6,447.4) v2(680.6,598.4) ; 630.67,467.4 590.6,467.4 v2(556.6,501.4) 556.6,740.4 582.81,766.61 630.67,766.61 661.7,766.61 v2(679.6,784.51) 702.49,807.4 838.6,807.4 870.6,839.4 870.6,1113.4 774.2,1209.8 774.2,1439.05 ; 630.67,579.61 661.8,579.61 v2(680.6,598.4) ; 630.67,729.21 659.79,729.21 v2(680.6,708.4) v2(680.6,598.4) ; 729.09,-1144.8 729.09,-1107.4 797.48,-1107.4 ; 729.09,-995.2 729.09,-957.8 797.53,-957.8 ; 729.09,-845.59 729.09,-808.19 797.68,-808.19 798.09,-807.77 ; 729.09,430 729.09,467.4 797.48,467.4 ; 729.09,579.61 729.09,617.01 797.53,617.01 ; 729.09,729.21 729.09,766.61 797.68,766.61 798.09,767.03 ; 755.03,-623.22 v2(829.6,-623.22) 829.6,-659.4 ; 755.03,951.58 v2(829.6,951.58) 829.6,915.4 ; 826.6,-662.4 828.6,-660.4 ; 826.6,912.4 828.6,914.4 ; 873.67,-1144.4 907.6,-1144.4 v2(923.6,-1128.4) ; 873.67,-1107 903.49,-1077.18 v2(1045.6,-1077.18) ; 873.67,-995.4 v2(922.6,-995.4) ; 873.67,-958 901.27,-930.4 v2(1045.6,-930.4) ; 873.67,-845.4 906.6,-845.4 v2(923.6,-862.4) ; 873.67,-808 906.08,-808 ; 873.67,430.4 907.6,430.4 v2(923.6,446.4) ; 873.67,467.8 903.49,497.62 v2(1045.6,497.62) ; 873.67,579.4 v2(922.6,579.4) ; 873.67,616.8 901.27,644.4 v2(1045.6,644.4) ; 873.67,729.4 906.6,729.4 v2(923.6,712.4) ; 873.67,766.8 906.89,766.8 v2(924.6,784.51) ; 972.09,-1107 972.09,-1144.4 1036.5,-1144.4 ; 972.09,-958 972.09,-995.4 1034.5,-995.4 ; 972.09,-845.4 972.09,-808 ; 972.09,467.8 972.09,430.4 1036.5,430.4 ; 972.09,616.8 972.09,579.4 1034.5,579.4 ; 972.09,729.4 972.09,766.8
  Top Layer w25: v4(115.35,-959.65) 199.57,-959.65 ; v4(115.35,615.16) 199.57,615.16
  Bottom Layer w6: 580.91,-207.62 580.91,-275.71 593.41,-288.21 651.41,-288.21 672.6,-309.4 672.6,-409.96 735.6,-472.96 735.6,-634.63 796.37,-695.4 947.6,-695.4 963.6,-711.4 v1(963.6,-775.4) ; 580.91,1367.19 580.91,1299.09 593.41,1286.59 651.41,1286.59 672.6,1265.4 672.6,1164.85 735.6,1101.85 735.6,940.18 796.37,879.4 947.6,879.4 963.6,863.4 v1(963.6,799.4) ; 639.96,-207.62 639.96,-253.76 683.6,-297.4 683.6,-405.4 746.6,-468.4 746.6,-630.07 800.93,-684.4 974.6,-684.4 988.6,-698.4 v1(988.6,-739.4) ; 639.96,1367.19 639.96,1321.04 683.6,1277.4 683.6,1169.4 746.6,1106.4 746.6,944.73 800.93,890.4 974.6,890.4 988.6,876.4 v1(988.6,835.4) ; 704.83,-366.9 704.83,-407.63 757.6,-460.4 757.6,-625.51 805.49,-673.4 1002.6,-673.4 1027.6,-698.4 v1(1027.6,-759.4) ; 704.83,1207.9 704.83,1167.17 757.6,1114.4 757.6,949.29 805.49,901.4 1002.6,901.4 1027.6,876.4 v1(1027.6,815.4) ; 767.82,-374.21 767.82,-366.9 768.6,-367.68 768.6,-620.96 810.04,-662.4 966.24,-662.4 v1@992.39,-636.25 ; 767.82,1200.59 767.82,1207.9 768.6,1207.12 768.6,953.85 810.04,912.4 966.24,912.4 v1@992.39,938.56 ; 798.83,-366.9 798.83,-389.17 779.6,-408.4 779.6,-616.4 814.6,-651.4 948.6,-651.4 v1(959.6,-640.4) ; 798.83,1207.9 798.83,1185.63 779.6,1166.4 779.6,958.4 814.6,923.4 948.6,923.4 v1(959.6,934.4) ; 842.34,-373.72 842.34,-366.9 842.34,-384.14 v1(888.1,-429.9) ; 842.34,1201.08 842.34,1207.9 842.34,1190.66 v1(888.1,1144.9) ; 873.83,-373.72 873.83,-366.9 873.83,-382.63 934.6,-443.4 v1(934.6,-469.4) ; 873.83,1201.08 873.83,1207.9 873.83,1192.17 934.6,1131.4 v1(934.6,1105.4) ; 905.33,-366.9 905.33,-376.13 v1@966.6,-437.4 ; 905.33,1207.9 905.33,1198.67 v1@966.6,1137.4 ; 936.34,-366.9 936.34,-377.14 v1(961.47,-402.27) ; 936.34,1207.9 936.34,1197.66 v1(961.47,1172.53) ; 981.1,-373.22 981.1,-366.4 981.1,-386.91 1017.6,-423.4 v1(1017.6,-650.4) ; 981.1,1201.58 981.1,1208.4 981.1,1187.9 1017.6,1151.4 v1(1017.6,924.4) ; 1012.6,-373.22 1012.6,-366.4 1012.6,-387.4 1041.6,-416.4 1041.6,-602.4 ; 1012.6,1201.58 1012.6,1208.4 1012.6,1187.4 1041.6,1158.4 1041.6,972.4 ; 1044.09,-366.4 1044.09,-385.39 1064.1,-405.4 1064.1,-800.4 ; 1044.09,1208.4 1044.09,1189.41 1064.1,1169.4 1064.1,774.4 ; 1075.1,-366.4 1075.1,-796.91 v1(1089.6,-811.4) ; 1075.1,1208.4 1075.1,777.9 v1(1089.6,763.4) ; 1117.6,-603.4 1117.6,-689.4 1136.6,-708.4 1230.6,-708.4 1246.07,-692.93 ; 1117.6,971.4 1117.6,885.4 1136.6,866.4 1230.6,866.4 1246.07,881.87 ; 1124.6,-357.99 1086.1,-396.49 1086.1,-727.91 1097.6,-739.4 1166.58,-739.4 1183.09,-755.91 ; 1124.6,1216.81 1086.1,1178.32 1086.1,846.9 1097.6,835.4 1166.58,835.4 1183.09,818.89 ; 1145.6,-452.28 1107.72,-452.28 1097.1,-462.9 1097.1,-695.93 1125.6,-724.42 1151.6,-724.42 ; 1145.6,1122.53 1107.72,1122.53 1097.1,1111.91 1097.1,878.88 1125.6,850.38 1151.6,850.38 ; 1151.6,-944.85 1151.6,-913.36 1151.6,-881.87 1183.09,-881.87 1183.09,-850.38 ; 1151.6,-818.89 1167.11,-818.89 1167.6,-818.4 ; 1151.6,-755.91 1167.6,-771.91 1167.6,-818.4 ; 1151.6,-692.93 1167.6,-676.93 1167.6,-646.4 ; 1151.6,-629.95 1151.6,-611.4 1158.6,-604.4 ; 1151.6,629.95 1151.6,661.44 1151.6,692.93 1183.09,692.93 1183.09,724.42 ; 1151.6,755.91 1167.11,755.91 1167.6,756.4 ; 1151.6,818.89 1167.6,802.89 1167.6,756.4 ; 1151.6,881.87 1167.6,897.87 1167.6,928.4 ; 1151.6,944.85 1151.6,963.4 1158.6,970.4 ; 1167.6,-633.4 1167.6,-646.4 ; 1167.6,941.4 1167.6,928.4 ; 1183.09,-724.42 v1(1198.07,-739.4) ; 1183.09,850.38 v1(1198.07,835.4) ; v1(1198.6,-771.42) 1214.58,-787.4 ; v1(1198.6,803.38) 1214.58,787.4 ; 1214.58,-818.89 1214.58,-819.38 v1(1229.6,-834.4) ; 1214.58,-755.91 v1(1229.81,-771.14) ; 1214.58,-631.42 1214.58,-629.95 1214.58,-598.98 1229.15,-584.4 1312.6,-584.4 1325.6,-597.4 1325.6,-630.4 ; 1214.58,755.91 1214.58,755.42 v1(1229.6,740.4) ; 1214.58,818.89 v1(1229.81,803.66) ; 1214.58,943.38 1214.58,944.85 1214.58,975.83 1229.15,990.4 1312.6,990.4 1325.6,977.4 1325.6,944.4 ; v1(1230.6,-646.4) 1231.03,-646.4 1246.07,-661.44 1246.07,-659.87 ; v1(1230.6,928.4) 1231.03,928.4 1246.07,913.36 1246.07,914.93 ; v1(1231.6,-865.4) 1246.07,-850.93 1246.07,-850.38 ; v1(1231.58,-804.4) 1246.07,-818.89 ; v1(1231.6,709.4) 1246.07,723.87 1246.07,724.42 ; v1(1231.58,770.4) 1246.07,755.91 ; 1246.07,-944.85 1246.07,-930.4 ; 1246.07,-629.95 1246.07,-605.4 ; 1246.07,629.95 1246.07,644.4 ; 1246.07,944.85 1246.07,969.4 ; v1(1261.6,-771.4) 1293.56,-771.4 1309.05,-755.91 ; v1(1261.6,-740.4) 1293.07,-740.4 1309.05,-724.42 1309.05,-725.95 ; v1(1261.6,803.4) 1293.56,803.4 1309.05,818.89 ; v1(1261.6,834.4) 1293.07,834.4 1309.05,850.38 1309.05,848.85 ; v1(1261.81,-677.67) v1@1261.81,-678.97 ; v1(1261.81,897.13) v1@1261.81,895.83 ; v1@1263.1,-707.9 1277.56,-693.44 1277.56,-692.93 ; v1@1263.1,866.9 1277.56,881.36 1277.56,881.87 ; 1277.56,-661.44 1262.46,-676.54 1262.46,-678.32 v1@1261.81,-678.97 ; 1277.56,-629.95 1277.56,-606.44 ; 1277.56,913.36 1262.46,898.27 1262.46,896.48 v1@1261.81,895.83 ; 1277.56,944.85 1277.56,968.36 ; v1(1293.58,-834.42) 1382.6,-834.4 1390.59,-826.41 1390.59,-800.33 1403.52,-787.4 ; v1(1293.57,-803.37) 1350.6,-803.4 1357.6,-796.4 1357.6,-775.4 1364.42,-768.58 1366.42,-768.58 1366.67,-768.84 1390.59,-768.84 1397.81,-761.62 ; v1(1293.58,740.38) 1382.6,740.4 1390.59,748.4 1390.59,774.48 1403.52,787.4 ; v1(1293.57,771.43) 1350.6,771.4 1357.6,778.4 1357.6,799.4 1364.42,806.22 1366.42,806.22 1366.67,805.97 1390.59,805.97 1397.81,813.19 ; v1(1294.6,-678.48) 1309.05,-692.93 ; v1(1294.6,-646.99) 1309.05,-661.44 ; v1(1294.6,896.32) 1309.05,881.87 ; v1(1294.6,927.81) 1309.05,913.36 ; 1309.05,-629.95 1325.15,-629.95 1325.6,-630.4 ; 1309.05,944.85 1325.15,944.85 1325.6,944.4 ; 1325.6,-898.42 1340.54,-913.36 ; 1325.6,676.38 1340.54,661.44 ; 1340.54,-787.4 1340.54,-774.19 1353.46,-761.27 1353.46,-742.99 1372.03,-724.42 ; 1340.54,-661.44 1340.54,-654.46 1356.6,-638.4 1356.6,-588.69 1361.6,-583.69 1361.6,-567.12 1349.88,-555.4 1230.6,-555.4 1167.6,-618.4 1167.6,-646.4 ; 1340.54,787.4 1340.54,800.61 1353.46,813.54 1353.46,831.82 1372.03,850.38 ; 1340.54,913.36 1340.54,920.34 1356.6,936.4 1356.6,986.12 1361.6,991.12 1361.6,1007.69 1349.88,1019.4 1230.6,1019.4 1167.6,956.4 1167.6,928.4 ; 1372.03,-692.93 1354.6,-675.5 1354.6,-657.4 1369.12,-642.88 1382.12,-642.88 1389.6,-635.4 1389.6,-548.4 1436.6,-501.4 v1(1436.6,-481.4) ; 1372.03,-661.44 1385.24,-661.44 1398.16,-648.52 1410.48,-648.52 1421.6,-637.4 1421.6,-599.4 1456.6,-564.4 v1(1456.6,-531.4) ; 1372.03,881.87 1354.6,899.3 1354.6,917.4 1369.12,931.93 1382.12,931.93 1389.6,939.4 1389.6,1026.4 1436.6,1073.4 v1(1436.6,1093.4) ; 1372.03,913.36 1385.24,913.36 1398.16,926.29 1410.48,926.29 1421.6,937.4 1421.6,975.4 1456.6,1010.4 v1(1456.6,1043.4) ; 1394.81,-764.62 1397.81,-761.62 ; 1394.81,810.19 1397.81,813.19 ; 1403.52,-881.87 1390.59,-894.8 1390.59,-921.73 1381.92,-930.4 1246.07,-930.4 ; 1403.52,-755.91 1397.81,-761.62 ; 1403.52,-724.42 1413.58,-724.42 1429.6,-708.4 v1(1450.6,-708.4) ; 1403.52,-692.93 1413.07,-692.93 1428.6,-677.4 v1(1450.6,-677.4) ; 1403.52,-629.95 1403.52,-585.48 ; 1403.52,692.93 1390.59,680.01 1390.59,653.07 1381.92,644.4 1246.07,644.4 ; 1403.52,818.89 1397.81,813.19 ; 1403.52,850.38 1413.58,850.38 1429.6,866.4 v1(1450.6,866.4) ; 1403.52,881.87 1413.07,881.87 1428.6,897.4 v1(1450.6,897.4) ; 1403.52,944.85 1403.52,989.32 ; v1(1418.78,-803.15) 1413.34,-803.15 1413.34,-801.4 1419.6,-801.4 1421.6,-803.4 1443.6,-803.4 1450.6,-796.4 1450.6,-771.81 1466.5,-755.91 ; v1(1419.6,-771.99) 1435.01,-787.4 ; v1(1419.6,771.4) 1443.6,771.4 1450.6,778.4 1450.6,802.99 1466.5,818.89 ; v1(1419.6,802.81) 1435.01,787.4 ; 1435.01,-913.36 1421.6,-899.95 1421.6,-863.79 1435.01,-850.38 ; 1435.01,-881.87 v1(1450.54,-897.4) ; 1435.01,-818.89 1450.6,-834.48 v1(1450.6,-866.4) ; 1435.01,-755.91 1435.01,-740.4 ; 1435.01,-724.42 1435.01,-740.4 ; 1435.01,-692.93 1428.62,-692.93 1411.15,-710.4 1388.39,-710.4 1374.37,-724.42 1372.03,-724.42 ; 1435.01,-661.44 1424.56,-661.44 1407.6,-678.4 1390.6,-678.4 1384.95,-684.05 1384.95,-698.29 1377.38,-705.86 1353.46,-705.86 1340.54,-692.93 1325.6,-677.99 1325.6,-630.4 ; 1435.01,661.44 1421.6,674.85 1421.6,711.01 1435.01,724.42 ; 1435.01,692.93 v1(1450.54,677.4) ; 1435.01,755.91 1450.6,740.32 v1(1450.6,708.4) ; 1435.01,818.89 1435.01,834.4 ; 1435.01,850.38 1435.01,834.4 ; 1435.01,881.87 1428.62,881.87 1411.15,864.4 1388.39,864.4 1374.37,850.38 1372.03,850.38 ; 1435.01,913.36 1424.56,913.36 1407.6,896.4 1390.6,896.4 1384.95,890.76 1384.95,876.52 1377.38,868.95 1353.46,868.95 1340.54,881.87 1325.6,896.81 1325.6,944.4 ; 1436.01,-739.4 1451.52,-739.4 1466.5,-724.42 ; 1436.01,835.4 1451.52,835.4 1466.5,850.38 ; v1(1451.6,-928.26) 1466.5,-913.36 ; v1(1451.6,646.54) 1466.5,661.44 ; 1466.5,-818.89 1480.09,-818.89 ; 1466.5,-787.4 1487.6,-787.4 ; 1466.5,755.91 1480.09,755.91 ; 1466.5,787.4 1487.6,787.4 ; 1167.6,-818.4 1167.6,-825.4 1176.6,-834.4 1193.6,-834.4 1199.6,-840.4 1199.6,-920.4 1209.6,-930.4 1246.07,-930.4 ; 1167.6,756.4 1167.6,749.4 1176.6,740.4 1193.6,740.4 1199.6,734.4 1199.6,654.4 1209.6,644.4 1246.07,644.4 ; v1@1261.81,-678.97 1258.6,-682.19 1261.81,-682.19 v1@1261.81,-678.97 ; v1@1261.81,895.83 1258.6,892.62 1261.81,892.62 v1@1261.81,895.83 ; 1372.03,-724.42 1388.01,-740.4 1435.01,-740.4 ; 1372.03,850.38 1388.01,834.4 1435.01,834.4
  Bottom Layer w10: v1(66.6,-713.58) 66.6,-822.4 105.42,-861.22 199.57,-861.22 ; v1(66.6,861.22) 66.6,752.4 105.42,713.58 199.57,713.58 ; 87.6,-405.4 117.6,-375.4 529.6,-375.4 v1(569.6,-415.4) ; 87.6,1169.4 117.6,1199.4 529.6,1199.4 v1(569.6,1159.4) ; v1@94.6,-744.4 125.42,-713.58 199.57,-713.58 ; v1@94.6,830.4 125.42,861.22 199.57,861.22 ; v1(118.6,-762.8) 199.57,-762.8 ; v1(118.6,812.01) 199.57,812.01 ; v1(139.6,-910.4) 199.57,-910.43 ; v1(139.6,664.4) 199.57,664.37 ; v1(140.6,-785.4) 167.2,-812.01 199.57,-812.01 ; v1(140.6,789.4) 167.2,762.8 199.57,762.8 ; 187.6,-405.4 250.6,-468.4 588.17,-468.4 644.6,-524.83 v1(644.6,-658.4) ; 187.6,1169.4 250.6,1106.4 588.17,1106.4 644.6,1049.98 v1(644.6,916.4) ; 237.6,-405.4 285.6,-453.4 594.39,-453.4 666.6,-525.61 v1(666.6,-628.4) ; 237.6,-345.4 245.62,-345.4 275.3,-315.72 535.67,-315.72 v1(538.36,-318.4) ; 237.6,1169.4 285.6,1121.4 594.39,1121.4 666.6,1049.19 v1(666.6,946.4) ; 237.6,1229.4 245.62,1229.4 275.3,1259.09 535.67,1259.09 v1(538.36,1256.4) ; 287.6,-405.4 288.6,-406.4 ; 287.6,1169.4 288.6,1168.4 ; 288.6,-405.4 288.6,-406.4 ; 288.6,1169.4 288.6,1168.4 ; v1(412.6,-1096.43) 412.6,-774.4 435.6,-751.4 562.6,-751.4 584.6,-729.4 v1(584.6,-665.4) ; v1(412.6,478.38) 412.6,800.4 435.6,823.4 562.6,823.4 584.6,845.4 v1(584.6,909.4) ; 430.6,-632.4 v1(430.6,-689.4) 430.39,-689.4 359.6,-760.19 359.6,-1344.4 434.6,-1419.4 690.6,-1419.4 v1(712.6,-1441.4) ; 430.6,942.4 v1(430.6,885.4) 430.39,885.4 359.6,814.61 359.6,230.4 434.6,155.4 690.6,155.4 v1(712.6,133.4) ; v1(436.6,-1030.4) 436.6,-789.4 459.6,-766.4 578.6,-766.4 606.6,-738.4 606.6,-566.9 v1(581.6,-541.9) ; v1(436.6,544.4) 436.6,785.4 459.6,808.4 578.6,808.4 606.6,836.4 606.6,1007.9 v1(581.6,1032.9) ; v1(461.6,-1004.4) 451.6,-994.4 451.6,-797.4 467.6,-781.4 584.81,-781.4 621.6,-744.61 621.6,-539.4 v1(581.08,-498.88) ; v1(461.6,570.4) 451.6,580.4 451.6,777.4 467.6,793.4 584.81,793.4 621.6,830.19 621.6,1035.4 v1(581.08,1075.92) ; v1(475.6,-882.4) 475.6,-979.4 489.6,-993.4 489.6,-1200.4 522.6,-1233.4 898.6,-1233.4 921.69,-1210.31 v1@921.69,-1182.2 ; v1(475.6,692.4) 475.6,595.4 489.6,581.4 489.6,374.4 522.6,341.4 898.6,341.4 921.69,364.5 v1@921.69,392.6 ; 493.6,-639.4 v1(493.6,-668.4) 493.6,-701.4 473.6,-721.4 462.6,-721.4 419.6,-721.4 374.6,-766.4 374.6,-1338.19 440.81,-1404.4 725.6,-1404.4 v1(762.6,-1441.4) ; 493.6,935.4 v1(493.6,906.4) 493.6,873.4 473.6,853.4 462.6,853.4 419.6,853.4 374.6,808.4 374.6,236.61 440.81,170.4 725.6,170.4 v1(762.6,133.4) ; v1@500.6,-494.4 v1(499.6,-493.4) 499.6,-527.4 495.6,-531.4 421.6,-531.4 417.6,-531.4 395.6,-553.4 395.6,-701.4 344.6,-752.4 344.6,-1355.4 430.6,-1441.4 v1(662.6,-1441.4) ; v1@500.6,1080.4 v1(499.6,1081.4) 499.6,1047.4 495.6,1043.4 421.6,1043.4 417.6,1043.4 395.6,1021.4 395.6,873.4 344.6,822.4 344.6,219.4 430.6,133.4 v1(662.6,133.4) ; v1@526.35,-895.9 v1(588.1,-895.9) 599.6,-907.4 730.6,-907.4 ; v1@526.35,678.9 v1(588.1,678.9) 599.6,667.4 730.6,667.4 ; 562.6,-632.99 562.6,-651.4 v1(547.6,-666.4) 547.6,-715.4 526.6,-736.4 425.81,-736.4 389.6,-772.61 389.6,-1331.98 447.02,-1389.4 760.6,-1389.4 v1(812.6,-1441.4) ; 562.6,941.81 562.6,923.4 v1(547.6,908.4) 547.6,859.4 526.6,838.4 425.81,838.4 389.6,802.19 389.6,242.83 447.02,185.4 760.6,185.4 v1(812.6,133.4) ; v1(587.6,-1046.4) 596.6,-1055.4 641.6,-1055.4 ; v1(587.6,528.4) 596.6,519.4 641.6,519.4 ; 616.6,-1055.4 641.6,-1055.4 ; 616.6,519.4 641.6,519.4 ; 659.65,-207.62 659.65,-132.35 685.6,-106.4 1037.6,-106.4 1048.6,-95.4 1048.6,-46.4 1062.6,-32.4 1224.6,-32.4 1257.65,-65.46 v1(1257.65,-361.4) ; 659.65,1367.19 659.65,1442.45 685.6,1468.4 1037.6,1468.4 1048.6,1479.4 1048.6,1528.4 1062.6,1542.4 1224.6,1542.4 1257.65,1509.35 v1(1257.65,1213.4) ; v1(677.2,-1181.8) 729.09,-1181.8 754.2,-1181.8 765.6,-1170.4 765.6,-942.4 730.6,-907.4 ; v1(677.2,393) 729.09,393 754.2,393 765.6,404.4 765.6,632.4 730.6,667.4 ; 679.33,-207.62 679.33,-142.67 692.6,-129.4 v1(1039.6,-129.4) ; 679.33,1367.19 679.33,1432.13 692.6,1445.4 v1(1039.6,1445.4) ; v1(690.6,-654.29) 690.6,-528.4 600.6,-438.4 320.6,-438.4 288.6,-406.4 ; v1(690.6,920.51) 690.6,1046.4 600.6,1136.4 320.6,1136.4 288.6,1168.4 ; 699.02,-207.62 699.02,-262.82 703.6,-267.4 703.6,-304.67 704.83,-305.9 ; 699.02,1367.19 699.02,1311.98 703.6,1307.4 703.6,1270.13 704.83,1268.9 ; 729.09,-1032.8 729.09,-1042.91 716.6,-1055.4 641.6,-1055.4 ; 729.09,542 729.09,531.9 716.6,519.4 641.6,519.4 ; 730.09,-882.8 730.09,-906.9 730.6,-907.4 ; 730.09,692 730.09,667.91 730.6,667.4 ; 767.82,-305.9 767.82,-294.18 817.13,-244.87 817.13,-207.62 ; 767.82,1268.9 767.82,1280.63 817.13,1329.93 817.13,1367.19 ; 798.83,-305.9 798.83,-293.17 856.5,-235.5 856.5,-207.62 ; 798.83,1268.9 798.83,1281.63 856.5,1339.3 856.5,1367.19 ; v2(829.6,-623.22) 846.42,-606.4 v1(957.6,-606.4) ; v2(829.6,951.58) 846.42,968.4 v1(957.6,968.4) ; 842.34,-305.9 842.34,-282.66 876.18,-248.82 876.18,-207.62 ; 842.34,1268.9 842.34,1292.14 876.18,1325.98 876.18,1367.19 ; 873.83,-305.9 873.83,-275.17 895.87,-253.13 895.87,-207.62 ; 873.83,1268.9 873.83,1299.63 895.87,1321.67 895.87,1367.19 ; 905.33,-305.9 905.33,-276.67 915.55,-266.45 915.55,-207.62 ; 905.33,1268.9 905.33,1298.13 915.55,1308.35 915.55,1367.19 ; v1(922.6,-1182.2) 971.53,-1182.2 ; v1(922.6,392.6) 971.53,392.6 ; 935.24,-207.62 935.24,-304.8 936.34,-305.9 ; 935.24,1367.19 935.24,1270 936.34,1268.9 ; 954.92,-207.62 954.92,-263.72 981.1,-289.91 981.1,-305.4 ; 954.92,1367.19 954.92,1311.08 981.1,1284.9 981.1,1269.4 ; 971.53,-1032.6 1000.4,-1032.6 v1(1013.23,-1045.42) ; 971.53,-882.99 999.19,-882.99 v1(1014.6,-898.4) ; 971.53,542.21 1000.4,542.21 v1(1013.23,529.38) ; 971.53,691.81 999.19,691.81 v1(1014.6,676.4) ; 974.61,-207.62 974.61,-250.41 1012.6,-288.4 1012.6,-305.4 ; 974.61,1367.19 974.61,1324.39 1012.6,1286.4 1012.6,1269.4 ; 994.29,-207.62 994.29,-244.09 1044.09,-293.9 1044.09,-305.4 ; 994.29,1367.19 994.29,1330.71 1044.09,1280.91 1044.09,1269.4 ; 1013.98,-207.62 1013.98,-242.57 1033.81,-262.4 1065.6,-262.4 1075.1,-271.91 1075.1,-305.4 ; 1013.98,1367.19 1013.98,1332.24 1033.81,1312.4 1065.6,1312.4 1075.1,1302.9 1075.1,1269.4 ; 1033.66,-207.62 1033.66,-238.46 1042.6,-247.4 1071.81,-247.4 1124.6,-300.19 1124.6,-306.81 ; 1033.66,1367.19 1033.66,1336.34 1042.6,1327.4 1071.81,1327.4 1124.6,1274.61 1124.6,1267.99 ; 1340.54,-629.95 v1(1340.54,-575.4) ; 1340.54,944.85 v1(1340.54,999.4)
  Bottom Layer w15: 430.6,-581.22 486.6,-581.22 515.52,-581.22 v3(525.6,-591.3) ; 430.6,993.58 486.6,993.58 515.52,993.58 v3(525.6,983.51) ; v3@535.08,-581.81 562.6,-581.81 546.78,-565.99 546.78,-531.4 ; v3@535.08,992.99 562.6,992.99 546.78,1008.81 546.78,1043.4
  Bottom Layer w20: 137.6,-405.4 137.6,-465.4 200.6,-528.4 v2(346.6,-528.4) ; 137.6,1169.4 137.6,1109.4 200.6,1046.4 v2(346.6,1046.4) ; v2@556.6,-1075.4 697.49,-1075.4 729.09,-1107 ; v2(556.6,-928.4) 699.49,-928.4 729.09,-958 ; v2@556.6,499.4 697.49,499.4 729.09,467.8 ; v2(556.6,646.4) 699.49,646.4 729.09,616.8 ; 575.27,-1146.4 577.27,-1144.4 630.67,-1144.4 630.67,-1107 ; 575.27,-845.4 631.67,-845.4 631.67,-808 ; 575.27,428.4 577.27,430.4 630.67,430.4 630.67,467.8 ; 575.27,729.4 631.67,729.4 631.67,766.8 ; 576.19,-995.4 630.67,-995.4 630.67,-958 ; 576.19,579.4 630.67,579.4 630.67,616.8 ; v2@610.6,-316.4 610.6,-410.4 717.6,-517.4 717.6,-726.86 764.14,-773.4 906.52,-773.4 v2(923.6,-790.48) 941.31,-808.19 971.53,-808.19 1028.84,-808.19 1045.6,-824.95 v2(1045.6,-930.4) 1045.6,-1076.4 1014.6,-1107.4 971.53,-1107.4 ; v2@610.6,1258.4 610.6,1164.4 717.6,1057.4 717.6,847.95 764.14,801.4 907.71,801.4 v2(924.6,784.51) 942.5,766.61 971.53,766.61 1028.84,766.61 1045.6,749.85 v2(1045.6,644.4) 1045.6,498.4 1014.6,467.4 971.53,467.4 ; v2(679.6,-790.29) 697.31,-808 730.09,-808 ; v2(679.6,784.51) 697.31,766.8 730.09,766.8 ; v2(680.6,-1127.4) 697.6,-1144.4 729.09,-1144.4 ; v2(680.6,-976.4) 699.6,-995.4 729.09,-995.4 ; v2(680.6,-866.4) 701.6,-845.4 730.09,-845.4 ; v2(680.6,447.4) 697.6,430.4 729.09,430.4 ; v2(680.6,598.4) 699.6,579.4 729.09,579.4 ; v2(680.6,708.4) 701.6,729.4 730.09,729.4 ; 798.09,-1108.02 872.49,-1108.02 873.1,-1107.4 873.1,-1144.8 ; 798.09,-958.36 872.54,-958.36 873.1,-957.8 873.1,-995.2 ; 798.09,-807.77 872.68,-807.77 ; 798.09,466.78 872.49,466.78 873.1,467.4 873.1,430 ; 798.09,616.44 872.54,616.44 873.1,617.01 873.1,579.61 ; 798.09,767.03 872.68,767.03 ; 873.1,-845.59 873.1,-808.19 ; 873.1,729.21 873.1,766.61 ; v2@923.8,-995.2 971.53,-995.2 ; v2@923.8,579.61 971.53,579.61 ; 971.53,-1144.8 940,-1144.8 v2(923.6,-1128.4) v2(923.6,-862.4) 940.41,-845.59 971.53,-845.59 ; 971.53,-957.8 1045.2,-957.8 ; 971.53,430 940,430 v2(923.6,446.4) v2(923.6,712.4) 940.41,729.21 971.53,729.21 ; 971.53,617.01 1045.2,617.01
  Bottom Layer w25: v4(115.35,-959.65) 50.84,-959.65 33.6,-942.4 33.6,-650.4 68.84,-615.16 199.57,-615.16 ; v4(115.35,615.16) 50.84,615.16 33.6,632.4 33.6,924.4 68.84,959.65 199.57,959.65
  other v1: 308.6,-1302.4 94.6,-745.4 369.6,-636.4 1247.6,-584.4 1277.6,-584.4 1154.6,-578.4 1120.6,-574.4 1041.6,-572.4 464.6,-495.4 308.6,272.4 94.6,829.4 369.6,938.4 1247.6,990.4 1277.6,990.4 1154.6,996.4 1120.6,1000.4 1041.6,1002.4 464.6,1079.4
  other v5: 1198.6,-286.4 1198.6,1288.4

## Keep-outs
Keep-Out Layer:
  lines w7.87: 0,0 0,157.48 ; 0,0 -157.48,0 0,0 ; 0,0 0,-157.48 0,0 ; 0,0 157.48,0 ; 0,0 157.48,0 ; 0,0 0,157.48 ; 0,0 157.48,0 ; 0,0 0,157.48 ; 1575,0 1575,157.48 ; 1575,0 1732.48,0 ; 1575,0 1575,157.48 ; 1575,0 1732.48,0 ; 1575,0 1575,-157.48 1575,0 ; 1575,0 1732.48,0 ; 1575,0 1417.52,0 1575,0 ; 1575,0 1575,157.48 ; -590.55,-590.55 590.55,-590.55 590.55,590.55 -590.55,590.55 -590.55,-590.55 ; -393.7,-393.7 393.7,-393.7 393.7,393.7 -393.7,393.7 -393.7,-393.7